# Altium PCB 频率计.PcbDoc
Units mm, origin at the board's own origin, x right, y up, seen from the top; angles counter-clockwise.
Board outline 70 x 50 mm, 2 copper layers (Top Layer, Bottom Layer); 21 components, 29 nets, 86 pads, 0 vias.
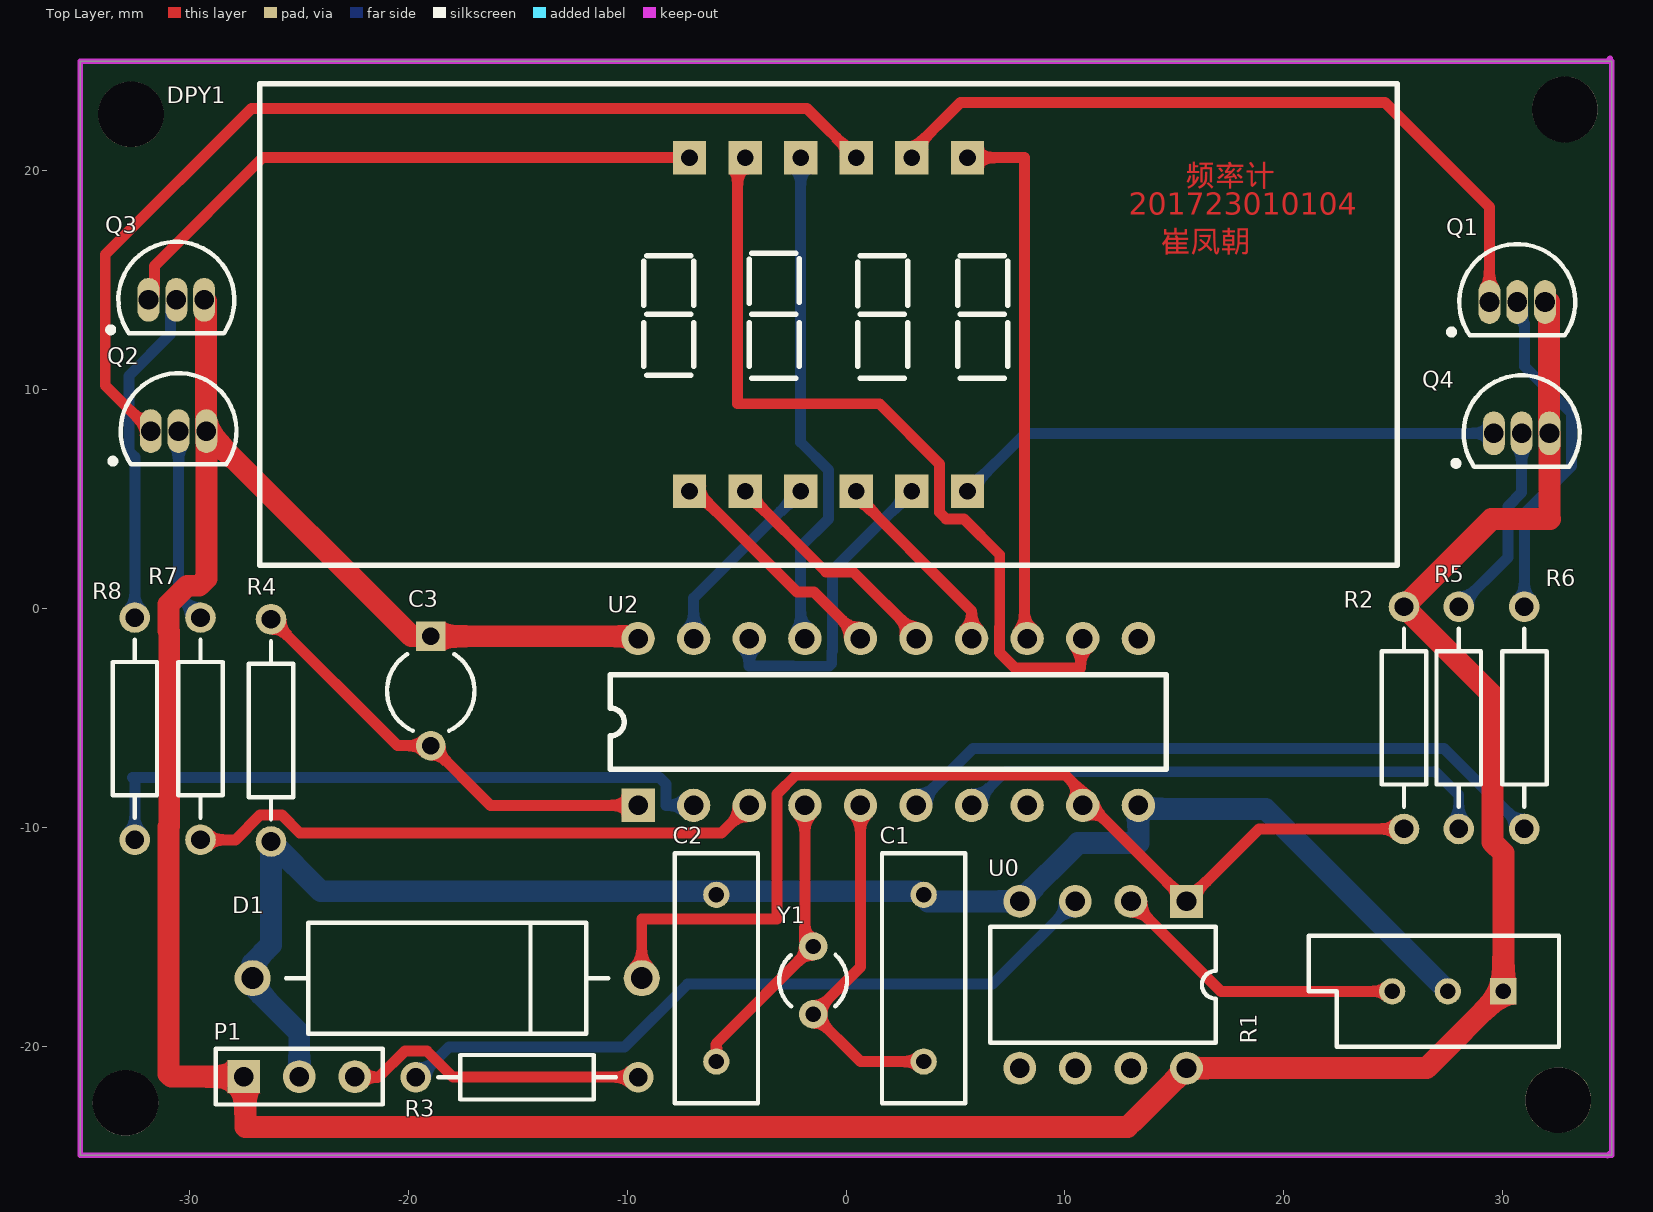
[diagram p0: Top Layer view]
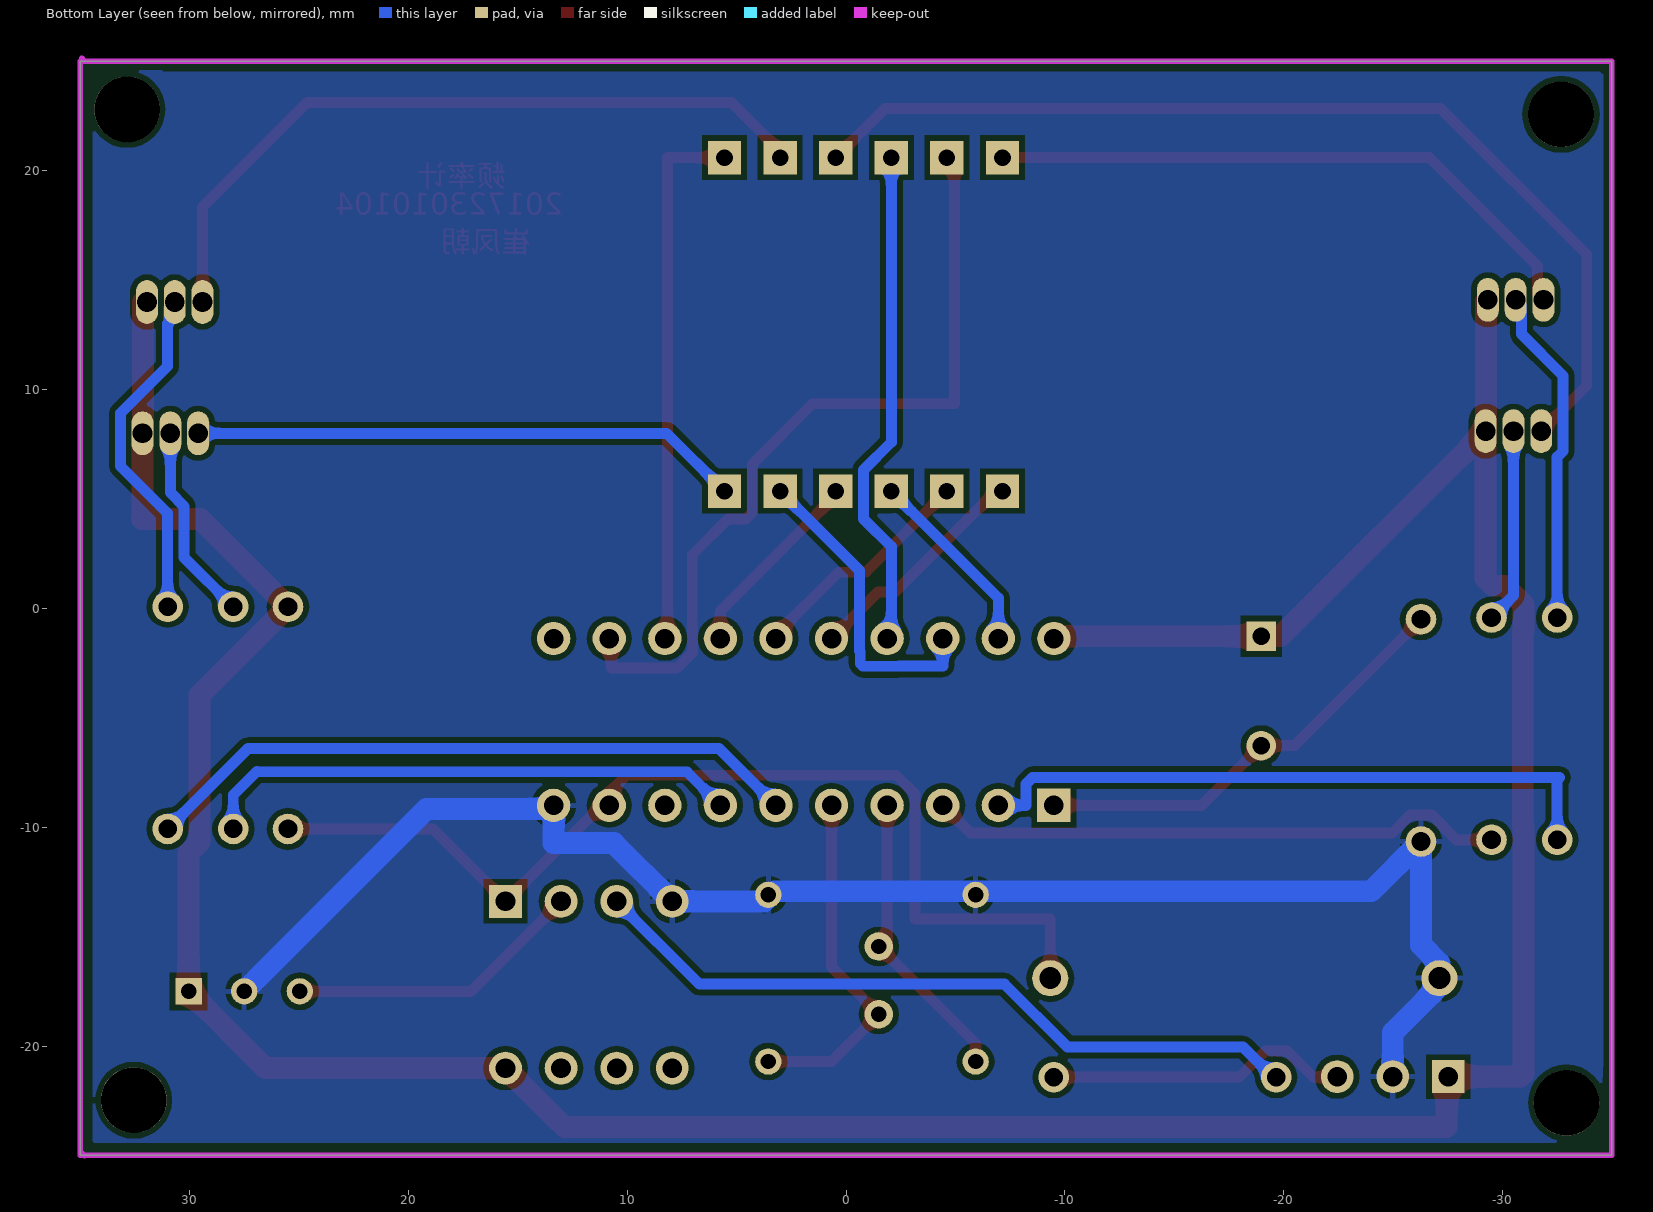
[diagram p1: Bottom Layer view, seen from below]

## Layer stack, top to bottom
Top Solder: solder mask 0.0102, Solder Resist, Dk 3.5
Top Layer: signal copper 0.0356
Dielectric 1: dielectric 0.32, FR-4, Dk 4.8
Bottom Layer: signal copper 0.0356
Bottom Solder: solder mask 0.0102, Solder Resist, Dk 3.5

## Board outline
-35,-25 35,-25 35,25 -35,25

## Design rules (kind name [scope] priority, off if disabled: settings)
Clearance [All] p1: gap=0.254
HoleSize [All] p1: absolutevalues=TRUE maxlimit=3.54 minlimit=0.025 maxpercent=80.000 minpercent=20.000
MinimumSolderMaskSliver [All] p1: minsoldermaskwidth=0.06
PolygonConnect [All] p1: connectstyle=Relief reliefconductorwidth=0.254 reliefentries=4 polygonreliefangle="90 Angle" airgapwidth=0.254
RoutingVias [All] p1: holewidth=0.711 width=1.27 viastyle="Through Hole" minholewidth=0.711 minwidth=1.27 maxholewidth=0.711 maxwidth=1.27
SilkToSolderMaskClearance [IsPad] p1: minsilkscreentomaskgap=0.1 clearancetoexposedcopper=TRUE
SolderMaskExpansion [All] p1: expansion=0.102
Width Width_VCC [InNet('VCC')] p1: maxlimit=1 minlimit=1 preferedwidth=1
Width Width_GND [InNet('GND')] p2: maxlimit=1 minlimit=1 preferedwidth=1
Width Width_All [All] p3: maxlimit=0.5 minlimit=0.5 preferedwidth=0.5
27 further rules are at their usual default settings.

## Components (designator, comment, footprint, x,y, rotation, side; value= is the part's Value field where it differs from the comment)
C1 "Cap" RAD-0.3 3.55,-16.9 r270 top
C2 "Cap" RAD-0.3 -5.925,-16.9 r270 top
C3 "Cap2" CAPR5-4X5 -18.975,-3.775 r270 top
D1 "1N4730" DIODE-0.7 -18.225,-16.9 r0 top
DPY1 "DPY_8_4" DPY_8_4 -0.8,12.975 r0 top
P1 "Header 3" HDR1X3 -27.525,-21.4 r0 top
Q1 "9012" TO-237-AA 30.675,14 r270 top
Q2 "9012" TO-226-AA -30.5,8.1 r270 top
Q3 "9012" TO-226-AA -30.6,14.1 r270 top
Q4 "9012" TO-226-AA 30.875,8 r270 top
R1 "Res Tap" VR5 27.5,-17.5 r180 top
R2 "Res2" AXIAL-0.4 25.5,-5 r90 top
R3 "Res2" AXIAL-0.4 -14.575,-21.425 r0 top
R4 "Res2" AXIAL-0.4 -26.275,-5.575 r270 top
R5 "Res2" AXIAL-0.4 28,-5 r90 top
R6 "Res2" AXIAL-0.4 31,-5 r90 top
R7 "Res2" AXIAL-0.4 -29.5,-5.5 r90 top
R8 "Res2" AXIAL-0.4 -32.5,-5.5 r90 top
U0 "LM393AN" 626-05 11.75,-17.2 r180 top
U2 "AT89C2051" DIP20 -9.5,-9 r90 top
Y1 "12MHz" R38 -1.5,-17 r0 top

## Footprints (in the part's own frame and the unit in brackets; to place one, negate y for a bottom-side part, rotate by r counter-clockwise, add the part's x,y. Pads: shape width x height; smd on the part's side, far side on the other; paste and mask are expansions set on the pad)
626-05 [mm] "DIP; 8 Leads; Row Spacing 7.62 mm; Pitch 2.54 mm"
  rect 1.5x1.5 hole 0.9: 1(-3.81,-3.81)
  round 1.5 hole 0.9: 2(-1.27,-3.81) 3(1.27,-3.81) 4(3.81,-3.81) 5(3.81,3.81) 6(1.27,3.81) 7(-1.27,3.81) 8(-3.81,3.81)
  silkscreen extent -5.15,-2.65 5.15,2.65
AXIAL-0.4 [mm] "Axial Device, Thru-Hole; 2 Leads; 0.4 in Pin Spacing"
  round 1.4 hole 0.85: 1(-5.08,0) 2(5.08,0)
  silkscreen extent -4.06,-1.02 4.06,1.02
CAPR5-4X5 [mm] "Capacitor; 2 Leads"
  rect 1.35x1.35 hole 0.8: 1(-2.5,0)
  round 1.35 hole 0.8: 2(2.5,0)
  silkscreen extent -1.69,-2 1.82,2
DIODE-0.7 [mm] "Diode, Thru-Hole; 2 Leads; 0.7 in Pin Spacing"
  round 1.65 hole 1: 1(-8.89,0) 2(8.89,0)
  silkscreen extent -7.37,-2.54 7.37,2.54
DIP20 [mil]
  rect 60x60 hole 35: 1(0,0)
  round 60 hole 35: 2(0,-100) 3(0,-200) 4(0,-300) 5(0,-400) 6(0,-500) 7(0,-600) 8(0,-700) 9(0,-800) 10(0,-900) 11(300,-900) 12(300,-800) 13(300,-700) 14(300,-600) 15(300,-500) 16(300,-400) 17(300,-300) 18(300,-200) 19(300,-100) 20(300,0)
  silkscreen extent 65,-950 235,50
DPY_8_4 [mil]
  rect 60x60 hole 29.92: 1(-250,-300) 2(-150,-300) 3(-50,-300) 4(50,-300) 5(150,-300) 6(250,-300) 7(250,300) 8(150,300) 9(50,300) 10(-50,300) 11(-150,300) 12(-250,300)
  silkscreen extent -1024,-433 1024,433
HDR1X3 [mm] "Connector; Header; 3 Position"
  rect 1.5x1.5 hole 0.9: 1(0,0)
  round 1.5 hole 0.9: 2(2.54,0) 3(5.08,0)
  silkscreen extent -1.27,-1.27 6.35,1.27
R38 [mm] "Crystal, Thru-Hole; 2 Leads; Body 3.1 x 8.2 mm (Dia.xH)"
  round 1.3 hole 0.7: 1(0,1.55) 2(0,-1.55)
  silkscreen extent -1.55,-1.19 1.55,1.17
RAD-0.3 [mm] "Radial Cap, Thru-Hole; 2 Leads; 0.3 in Pin Spacing"
  round 1.2 hole 0.7: 1(-3.81,0) 2(3.81,0)
  silkscreen extent -5.71,-1.91 5.71,1.91
TO-226-AA [mm] "TO, Flat Index; 3 In-Line, Axial Leads; Body Dia. 4.8mm; Leads 0.55 x 0.51 mm (max)"
  oval 2x1 hole 0.9: 1(0,-1.27) 2(0,0) 3(0,1.27)
  silkscreen extent -2.65,-3.13 1.52,2.65, body extent -2.65,-2.66 1.52,2.66, height 5.33
TO-237-AA [mm] "TO, Flat Index; 3 In-Line, Axial Leads; Body Dia. 4.8mm; Lead Dia. 0.56 mm (max)"
  oval 2x1 hole 0.9: 1(0,-1.27) 2(0,0) 3(0,1.27)
  silkscreen extent -2.65,-3.13 1.52,2.65, body extent -2.65,-2.66 1.52,2.66, height 7.11
VR5 [mm] "Thru-Hole; 3 Leads"
  rect 1.2x1.2 hole 0.7: 1(-2.54,0)
  round 1.2 hole 0.7: 2(0,0) 3(2.54,0)
  silkscreen extent -5.08,-2.54 6.35,2.54

## Part data
C1 C2 C3: "Capacitor"
D1: library part "D Zener", "Zener Diode"
P1: "Header, 3-Pin"
Q1 Q2 Q3 Q4: library part PNP, "PNP Bipolar Transistor"
R1: "Tapped Resistor"
R2 R3 R4 R5 R6 R7 R8: "Resistor"
U0: "Dual Comparator"
Y1: library part XTAL, "Crystal Oscillator"

## Free pads (board coordinates)
  round 3 hole 3: 8(-32.925,-22.6) 9(-32.675,22.575) 10(32.85,22.8) 11(32.55,-22.475)

## Nets (pads, with @x,y where several pads share a name; then routed paths per layer and width w, separated by ;. In a path a pad name is that pad's centre, name@x,y a point inside that pad or via, vN(x,y) a via of type N, cw(c..) or ccw(c..) an arc to the next point about the centre after c; other vN are vias at no path point)
DG1: DPY1.12 Q3.1 | length 28.2
  Top Layer w0.5: Q3.1 -31.604,14.366 -31.604,15.646 -26.655,20.595 DPY1.12
DG2: DPY1.9 Q2.1 | length 47
  Top Layer w0.5: Q2.1 -33.85,10.18 -33.85,16.175 -27.175,22.85 -1.785,22.85 DPY1.9
DG3: DPY1.8 Q1.1 | length 34
  Top Layer w0.5: DPY1.8 3.01,20.91 5.225,23.125 24.625,23.125 29.405,18.345 Q1.1
DG4: DPY1.6 Q4.1 | length 25.2
  Bottom Layer w0.5: DPY1.6 8.195,8 Q4.1
GND: C1.1 C2.1 D1.1 P1.2 R1.2 R4.2 U0.4 U2.10 | length 72.8
  Bottom Layer w1: D1.1 -27.115,-17.26 -24.985,-19.39 P1.2 ; D1.1@-27.115,-16.725 -27.115,-16.215 -26.275,-15.375 R4.2 -24.005,-12.925 3.275,-12.925 3.74,-13.39 U0.4 10.605,-10.725 13.36,-10.725 U2.10 ; U2.10@13.525,-9.165 19.165,-9.165 R1.2
NetP1_3: P1.3 R3.2 | length 14
  Top Layer w0.5: P1.3 -22.42,-21.425 -21.358,-21.425 -20.154,-20.221 -19.156,-20.221 -17.952,-21.425 R3.2
NetQ1_2: Q1.2 R6.2 | length 15.9
  Bottom Layer w0.5: Q1.2 30.941,13.734 30.941,13.025 31,13.025 31,11.065 33.149,8.916 33.149,6.496 31,4.347 R6.2
NetQ2_2: Q2.2 R7.2 | length 8.9
  Bottom Layer w0.5: Q2.2 -30.5,0.58 R7.2
NetQ3_2: Q3.2 R8.2 | length 15.5
  Bottom Layer w0.5: R8.2 -32.5,6.91 -32.774,7.184 -32.774,10.626 -30.866,12.534 -30.866,13.834 Q3.2
NetQ4_2: Q4.2 R5.2 | length 9.1
  Bottom Layer w0.5: R5.2 30.246,2.326 30.246,4.659 30.875,5.288 Q4.2
NetR1_3: R1.3 U0.2 | length 13.6
  Top Layer w0.5: U0.2 17.13,-17.5 R1.3
NetR3_1: R3.1 U0.3 | length 33.5
  Bottom Layer w0.5: R3.1 -19.525,-21.425 -18.15,-20.05 -10.125,-20.05 -7.25,-17.175 6.695,-17.175 U0.3
PB0: DPY1.11 U2.12 | length 37.5
  Top Layer w0.5: DPY1.11 -4.95,20.255 -4.95,9.35 1.525,9.35 4.275,6.6 4.275,6.328 4.276,6.327 4.276,4.392 4.579,4.089 5.386,4.089 7.025,2.45 7.025,-0.834 7.014,-0.845 7.014,-2.014 7.725,-2.725 10.725,-2.725 10.725,-1.475 U2.12
  Bottom Layer w0.5: DPY1.11 DPY1.11@-4.455,20.595
PB1: DPY1.7 U2.13 | length 24.6
  Top Layer w0.5: DPY1.7 8.155,20.595 8.155,-1.255 U2.13
PB2: DPY1.4 U2.14 | length 9.4
  Top Layer w0.5: DPY1.4@0.02,5.605 5.74,-0.115 U2.14
PB3: DPY1.2 U2.15 | length 10.7
  Top Layer w0.5: DPY1.2 -0.905,1.65 0.35,1.65 3.2,-1.2 U2.15
PB4: DPY1.1 U2.16 | length 11.1
  Top Layer w0.5: DPY1.1@-6.695,5.355 DPY1.1 -6.847,5.355 -2.242,0.75 -1.47,0.75 U2.16
PB5: DPY1.10 U2.17 | length 23.1
  Bottom Layer w0.5: DPY1.10 -2.07,7.592 -0.804,6.326 -0.804,4.089 -2.07,2.823 -2.07,-1.19 U2.17
PB6: DPY1.5 U2.18 | length 14.5
  Bottom Layer w0.5: U2.18 -4.425,-1.385 -4.425,-2.625 -2.425,-2.625 -2.404,-2.646 -0.771,-2.646 -0.65,-2.525 -0.65,-1.976 -0.614,-1.94 -0.614,1.731 DPY1.5
PB7: DPY1.3 U2.19 | length 8.8
  Bottom Layer w0.5: U2.19 -6.96,0.465 DPY1.3
PD0: R8.1 U2.2 | length 29.6
  Bottom Layer w0.5: R8.1 -32.5,-7.843 -32.609,-7.734 -8.529,-7.734 -8.234,-8.029 -8.234,-9 U2.2
PD1: R7.1 U2.3 | length 26.7
  Top Layer w0.5: R7.1@-29.445,-10.455 -29.375,-10.455 R7.1 -27.903,-10.58 -26.774,-9.451 -25.776,-9.451 -24.961,-10.266 -5.686,-10.266 U2.3
PD2: R6.1 U2.6 | length 30.4
  Bottom Layer w0.5: U2.6 5.8,-6.4 27.32,-6.4 R6.1
PD3: R5.1 U2.7 | length 24.9
  Bottom Layer w0.5: U2.7 7.275,-7.465 26.91,-7.465 26.925,-7.45 28,-8.525 R5.1
PD5: D1.2 R2.1 U0.1 U2.9 | length 47.7
  Top Layer w0.5: D1.2 -9.335,-14.194 -3.146,-14.194 -3.146,-8.476 -2.295,-7.625 10.025,-7.625 10.82,-8.42 U2.9 11.17,-9 U0.1 18.87,-10.08 R2.1
RST: C3.2 R4.1 U2.1 | length 20.3
  Top Layer w0.5: R4.1 -20.495,-6.275 C3.2 -16.25,-9 U2.1
VCC: C3.1 P1.1 Q1.3 Q2.3 Q3.3 Q4.3 R1.1 R2.2 U0.8 U2.20 | length 163.6
  Top Layer w1: Q3.3 -29.246,14.016 Q2.3@-29.246,8.116 ; U2.20 -9.605,-1.275 C3.1 -19.855,-1.275 Q2.3 -29.23,1.366 -29.562,1.034 -30.102,1.034 -30.954,0.182 -30.954,-1.022 -30.925,-1.051 -30.925,-9.949 -30.954,-9.978 -30.954,-21.271 -30.825,-21.4 P1.1 -27.45,-21.475 -27.45,-23.7 12.87,-23.7 ; 13.091,-23.479 U0.8 26.53,-21.01 R1.1 30.04,-11.176 29.546,-10.682 29.546,-3.966 R2.2 29.495,4.075 32.175,4.075 32.145,4.105 Q4.3 32.129,8.016 32.129,14 Q1.3
X1: C1.2 U2.5 Y1.2 | length 16.4
  Top Layer w0.5: U2.5 0.66,-16.39 Y1.2 0.66,-20.71 C1.2
X2: C2.2 U2.4 Y1.1 | length 13.7
  Top Layer w0.5: C2.2 -5.925,-19.875 Y1.1 -1.88,-15.07 U2.4
pads on no net: U0.5 U0.6 U0.7 U2.8 U2.11

## Polygon pours and split planes (outlines as drawn)
GND on Bottom Layer "Top Layer-No Net" (solid, remove dead copper, pour order 10): -34.45,-24.425 34.35,-24.425 34.425,-24.35 34.425,24.375 34.425,24.525 34.35,24.6 34.275,24.6 31.275,24.6 31.2,24.525 3.325,24.525 -34.45,24.525 -34.525,24.45 -34.6,24.375 -34.6,-20.725

## Keep-outs
Keep-Out Layer:
  lines w0.254: 34.798,-25.019 34.925,-24.892 ; 34.798,25.019 34.925,25.146 ; -35,-25 35,-25 35,25 -35,25 -35,-25

## Other copper
Top Layer:
  text "频率计" at 15.5,18.95 h1.72
  text "201723010104 /     崔凤朝" at 12.925,15.925 h1.72

## Silkscreen, mask and mechanical layers (free items; w line width, h text height)
Mechanical 1:
  lines w0.254: -39.878,-23.476 -39.37,-25 ; -39.878,23.476 -39.37,25 ; -39.624,-25 -39.116,-25 ; -39.624,25 -39.116,25 ; -39.37,-5.104 -39.37,-25 ; -39.37,5.104 -39.37,25 ; -38.862,-23.476 -39.37,-25 ; -38.862,23.476 -39.37,25 ; -35,29.972 -35,30.48 ; -33.477,30.737 -35,30.226 ; -33.475,29.721 -35,30.226 ; -5.104,30.28 -35,30.226 ; 5.104,30.299 35,30.353 ; 33.475,30.858 35,30.353 ; 33.477,29.842 35,30.353 ; 35,30.099 35,30.607 ; -35,-25 -35,25 35,25 35,-25 -35,-25
  text "70 (mm)" at -4.848,29.367 h0.75 r0.1
  text "50 (mm)" at -38.456,-4.85 h0.75 r90